# Altium PCB PCBGOST.PcbDoc (part 1 of 3)
Units mm, origin at the board's own origin, x right, y up, seen from the top; angles counter-clockwise.
Board outline 200 x 200 mm, 2 copper layers (Top Layer, Bottom Layer), stack 1.64 mm thick; 237 components, 177 nets, 928 pads, 315 vias.
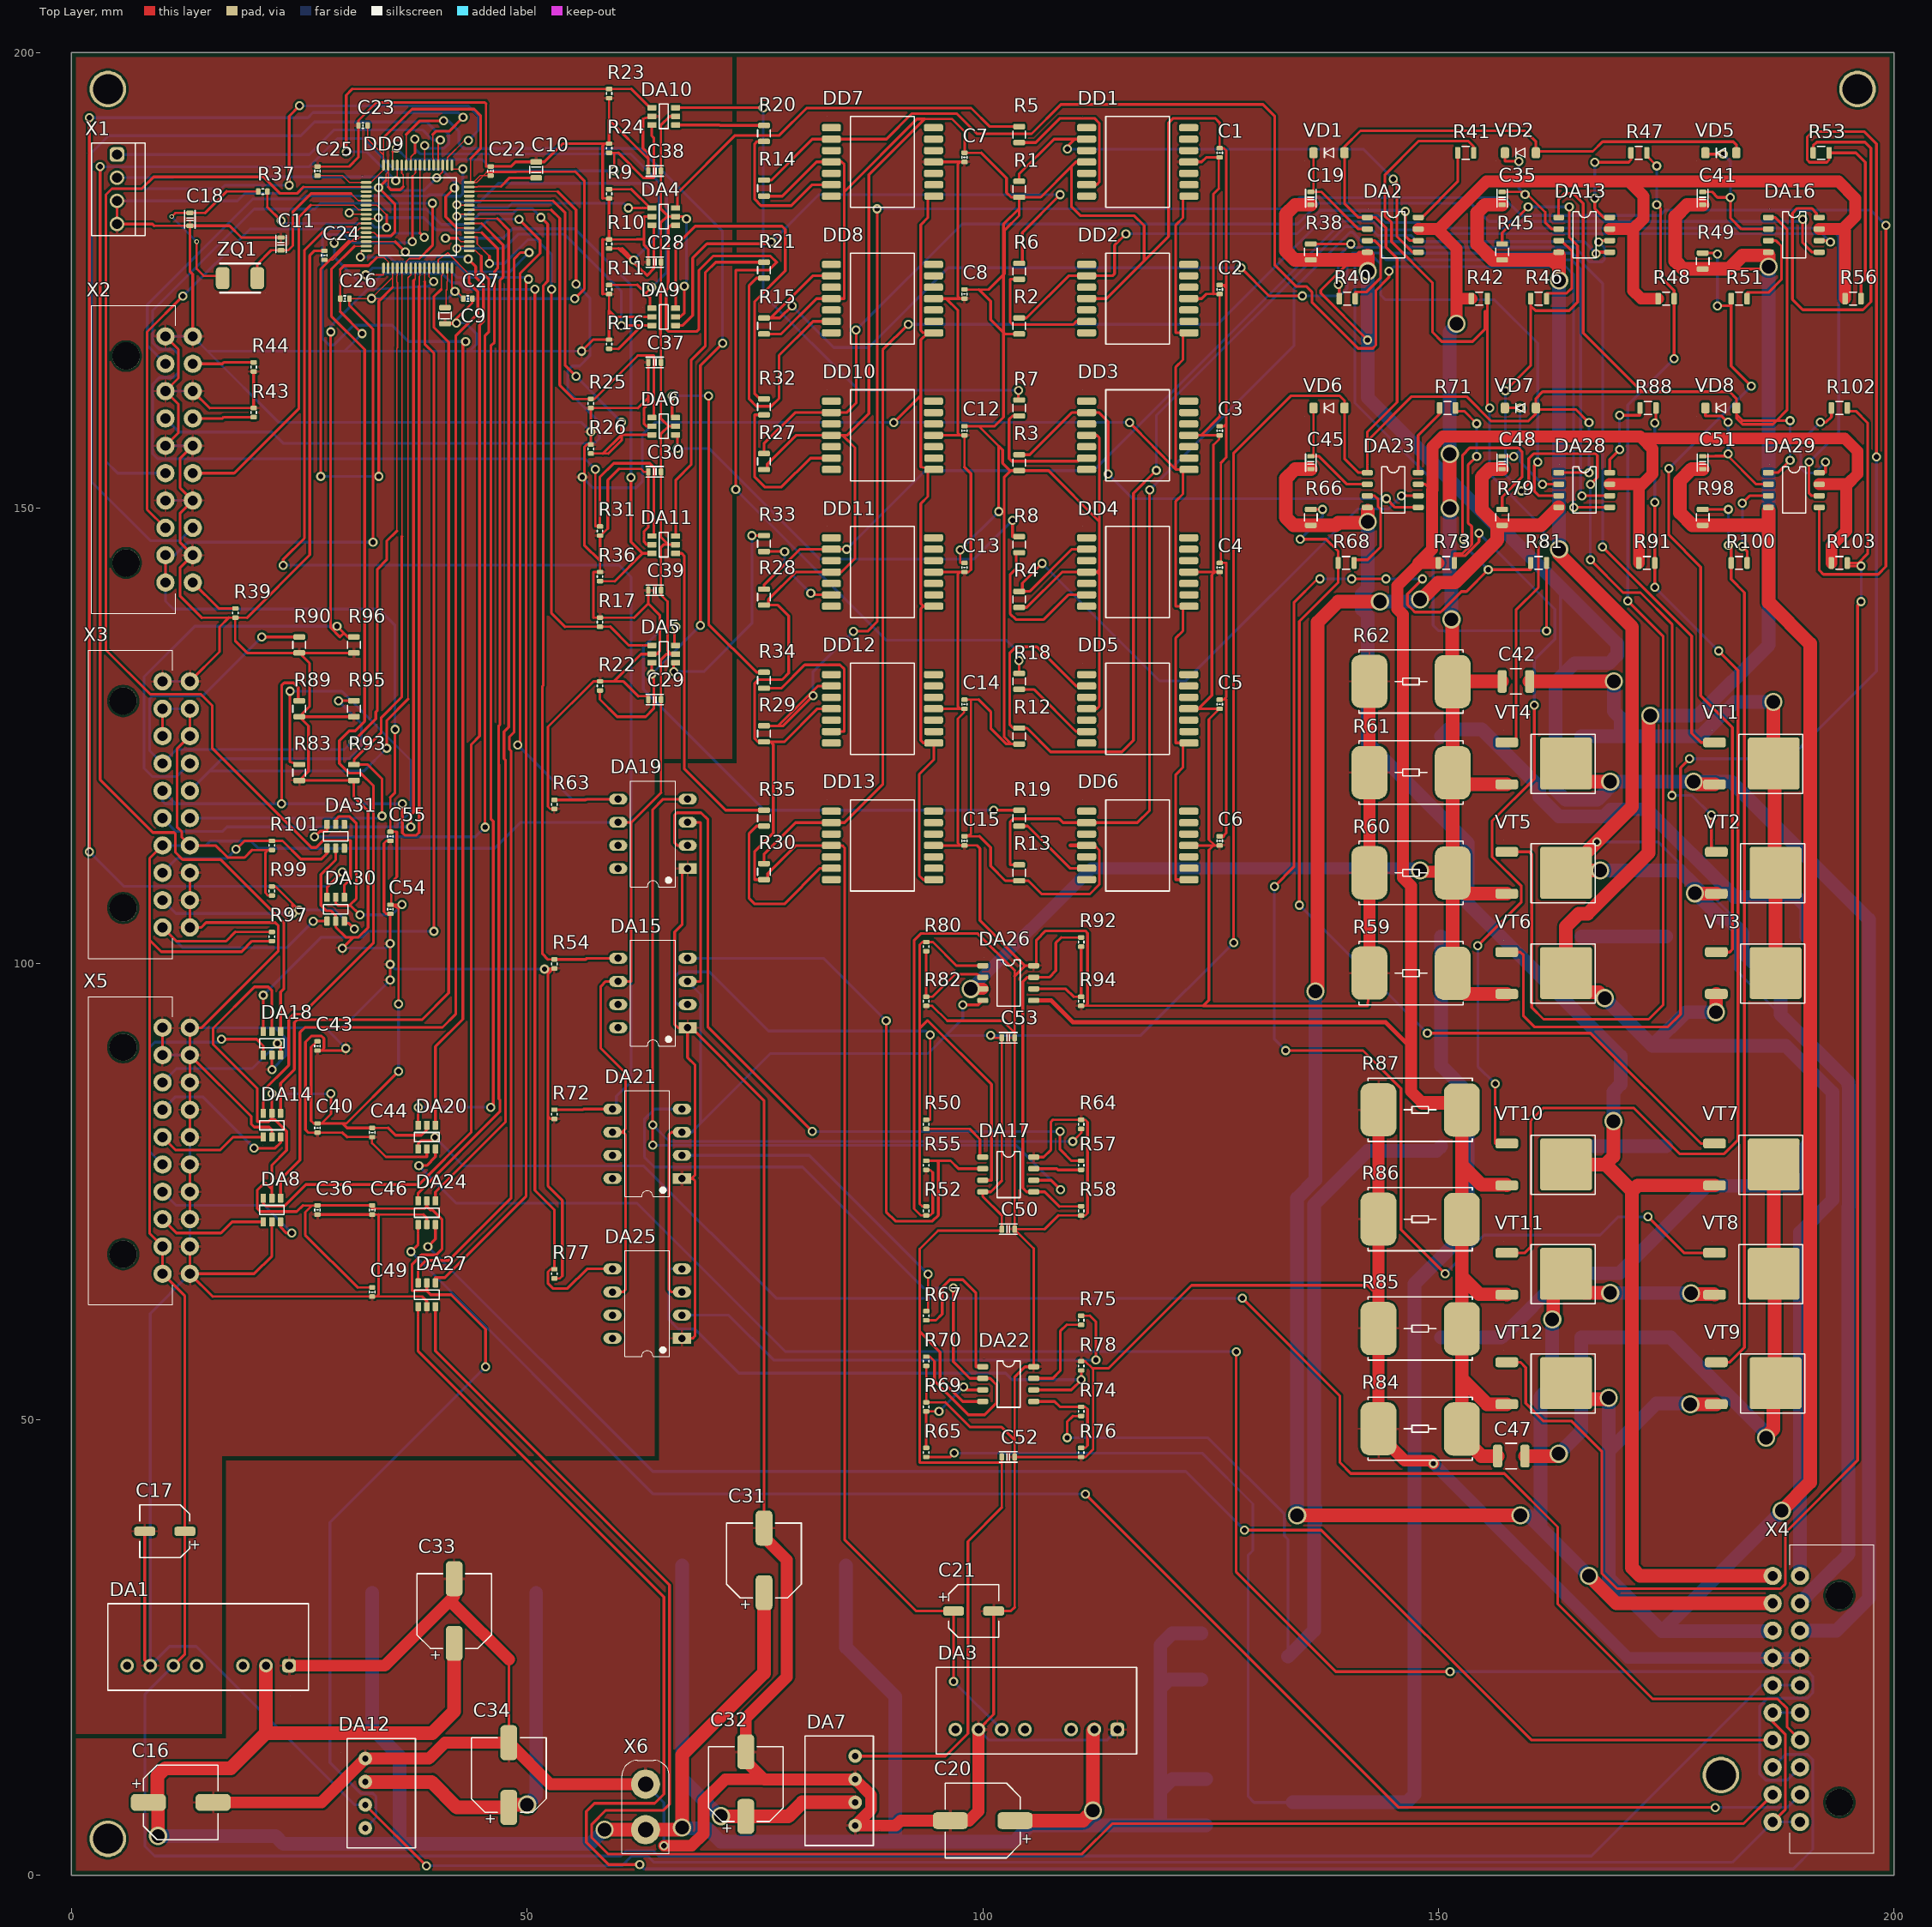
[diagram p0: Top Layer view]
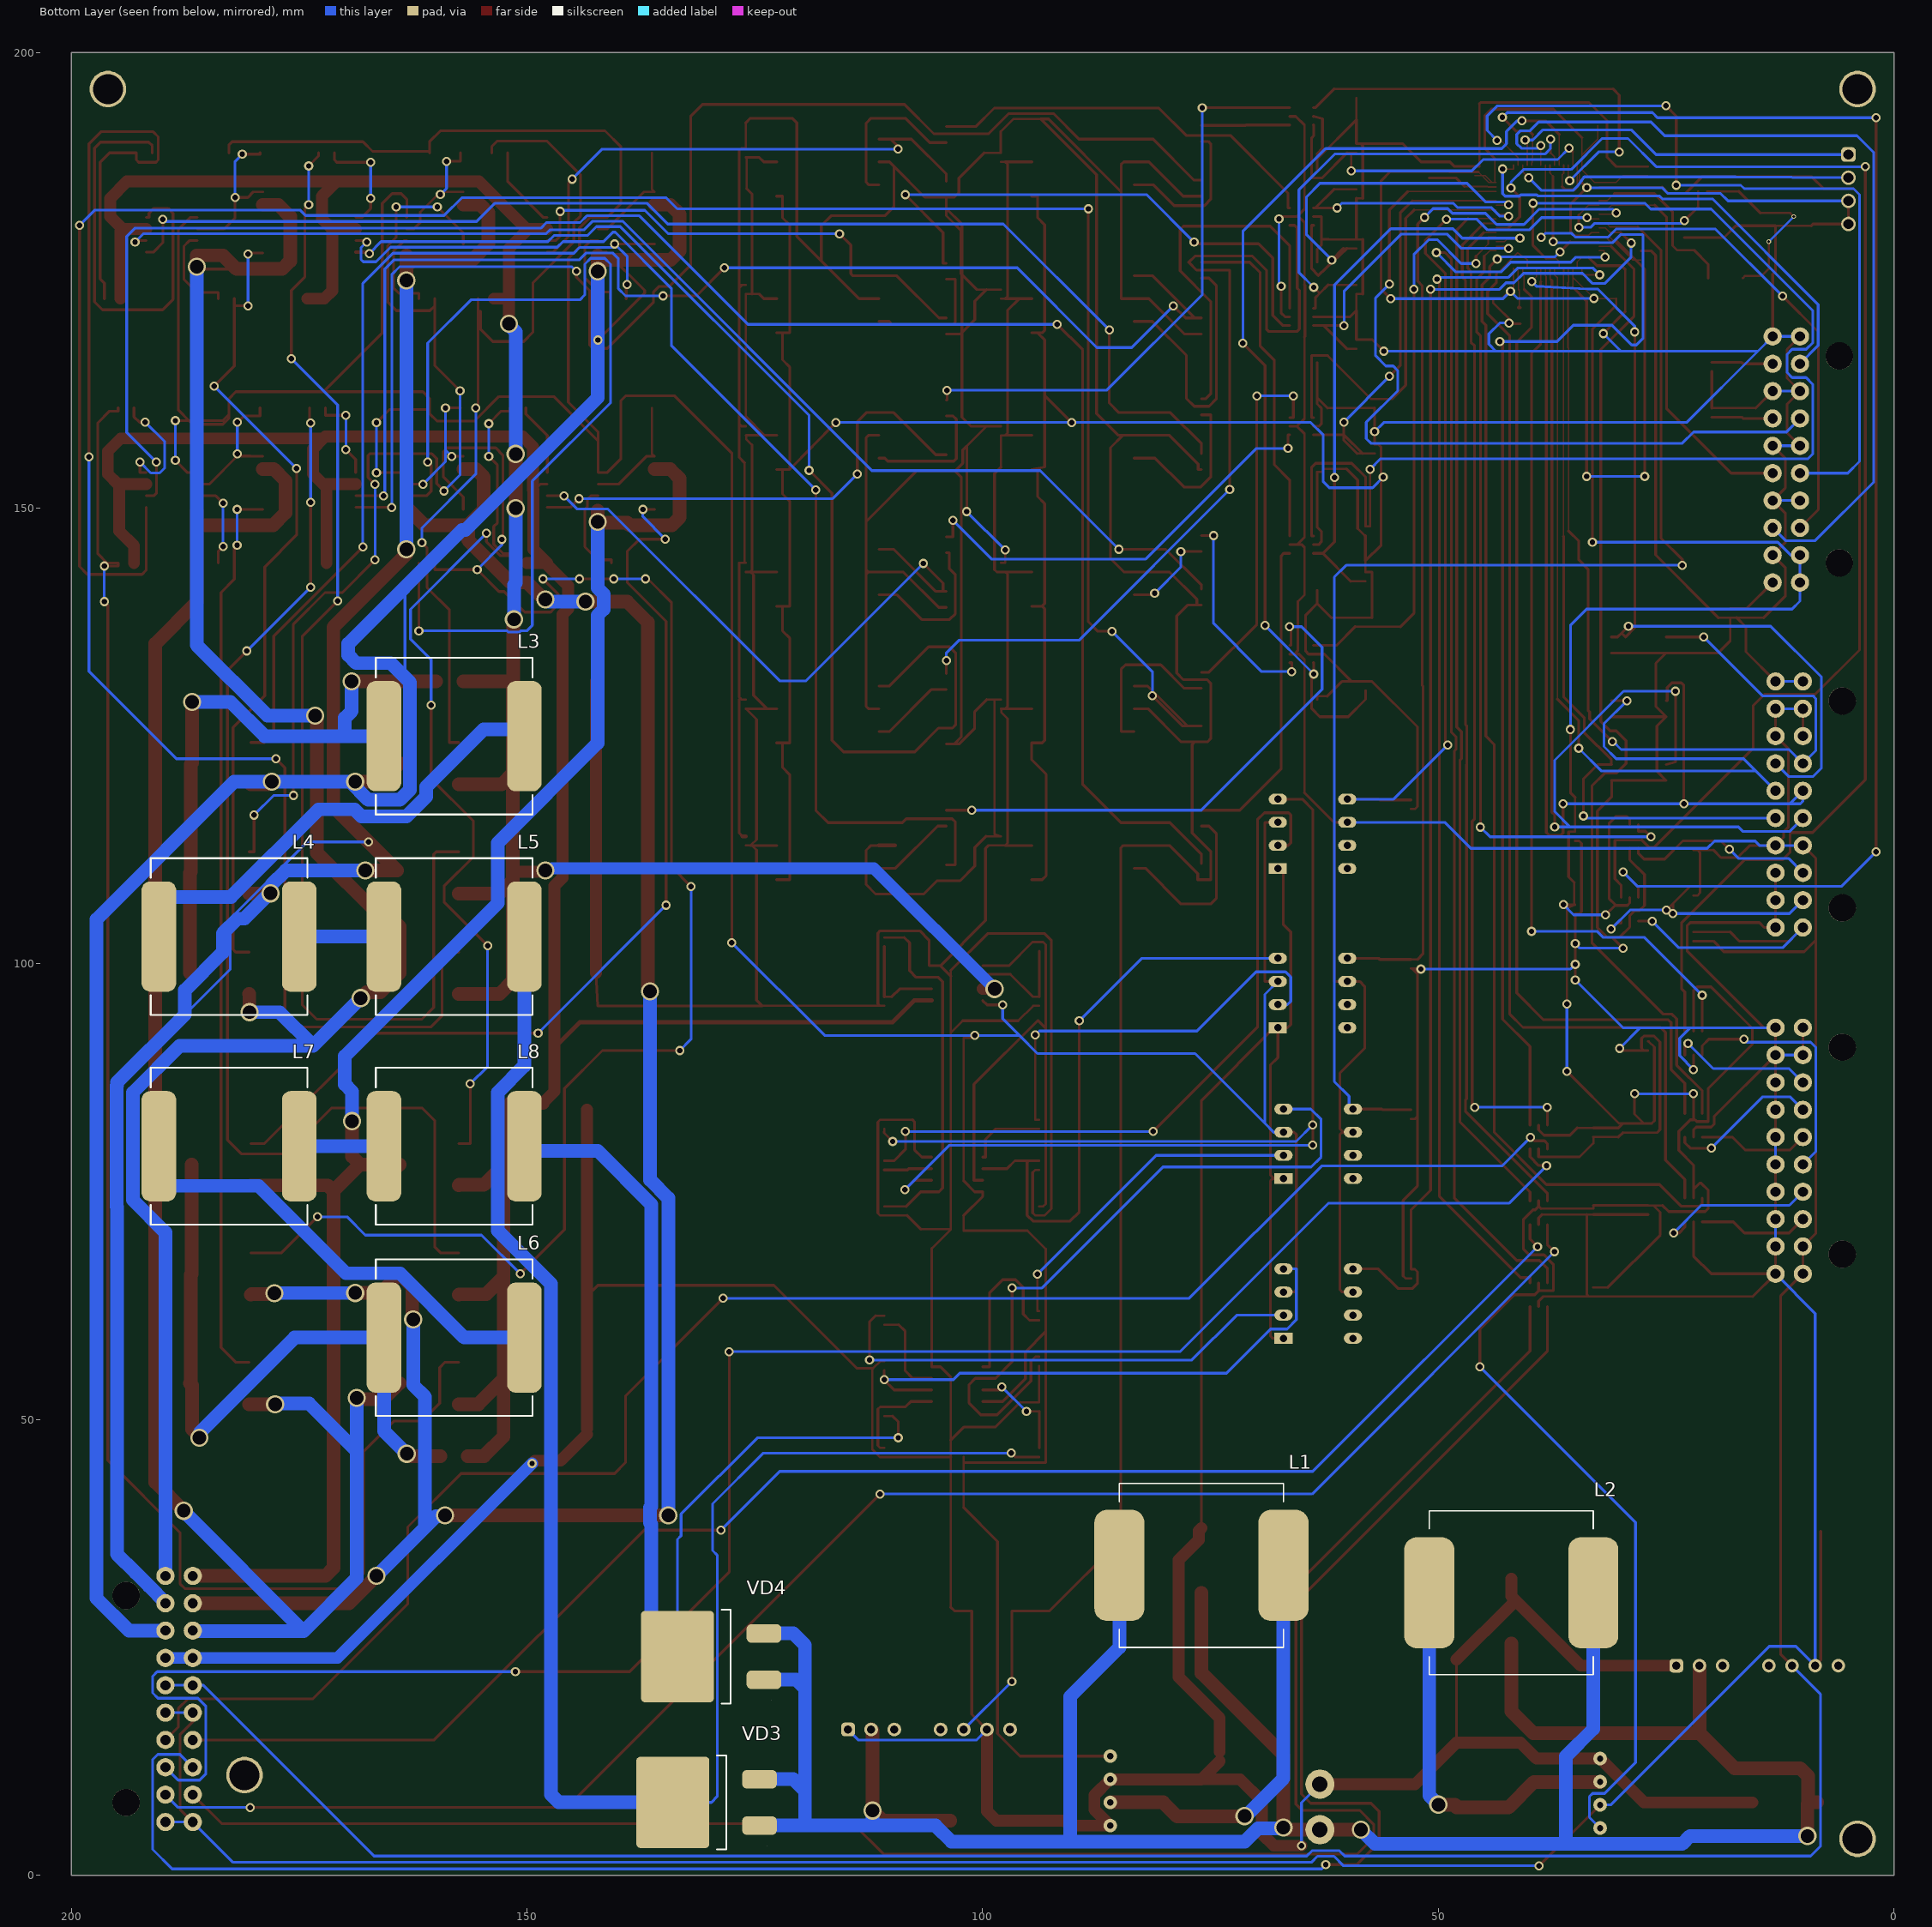
[diagram p1: Bottom Layer view, seen from below]

## Layer stack, top to bottom
Top Solder: solder mask 0.0102, Solder Resist, Dk 3.5
Top Layer: signal copper 0.07
Dielectric 1: dielectric 1.5, FR-4, Dk 4.8
Bottom Layer: signal copper 0.07
Bottom Solder: solder mask 0.0102, Solder Resist, Dk 3.5

## Board outline
0,0 0,200 200,200 200,0

## Design rules (kind name [scope] priority, off if disabled: settings)
Clearance [All] p1: gap=0.254 ignorepadtopadclearanceinfootprint=FALSE except(0: Arc-Hole Track-Hole SMDPad-Hole THPad-Hole Via-Hole Fill-Hole Poly-Hole Region-Hole Text-Hole; 0.2: Arc-SMDPad Track-SMDPad SMDPad-SMDPad; 0.3: Arc-Arc Arc-Track Track-Track)
PolygonConnect [All] p1: connectstyle=Relief reliefconductorwidth=0.254 reliefentries=4 polygonreliefangle="90 Angle" airgapwidth=0.254
RoutingVias [All] p1: holewidth=0.6 width=1 viastyle="Through Hole" minholewidth=0.3 minwidth=0.5 maxholewidth=1.5 maxwidth=2
SMDNeckDown [All] p1: percent=50.000
SolderMaskExpansion [All] p1: expansion=0.102 istentingtop=FALSE
Width [All] p1: maxlimit=1.5 minlimit=0.15 preferedwidth=0.3 minimp=50.000000 maximp=50.000000 favimp=50.000000
30 further rules are at their usual default settings.

## Components (designator, comment, footprint, x,y, rotation, side; value= is the part's Value field where it differs from the comment)
C1 "0,1uF" C0402C 126,189 r270 top value=0,1
C2 "0,1uF" C0402C 126,174 r270 top value=0,1
C3 "0,1uF" C0402C 126,158.5 r270 top value=0,1
C4 "0,1uF" C0402C 126,143.5 r270 top value=0,1
C5 "0,1uF" C0402C 126,128.5 r270 top value=0,1
C6 "0,1uF" C0402C 126,113.5 r270 top value=0,1
C7 "0,1uF" C0402C 98,188.5 r270 top value=0,1
C8 "0,1uF" C0402C 98,173.5 r270 top value=0,1
C9 "2.2uF" C0805C 41,171.125 r270 top value=2,2
C10 "2.2uF" C0805C 51,187.125 r90 top value=2,2
C11 "15pF" C0603C 23,179 r90 top value=15
C12 "0,1uF" C0402C 98,158.5 r270 top value=0,1
C13 "0,1uF" C0402C 98,143.5 r270 top value=0,1
C14 "0,1uF" C0402C 98,128.5 r270 top value=0,1
C15 "0,1uF" C0402C 98,113.5 r270 top value=0,1
C16 "100.0uF 50V" CAPAE-F 12,8 r0 top value=100,0
C17 "22.0uF 25V" CAPAE-C 10.25,37.75 r180 top value=22,0
C18 "15pF" C0603C 13,181.7 r270 top value=15
C19 "0,1uF" C0603C 136,184 r270 top value=0,1
C20 "100.0uF 50V" CAPAE-F 100,6 r180 top value=100,0
C21 "22.0uF 25V" CAPAE-C 99,29 r0 top value=22,0
C22 "0,1uF" C0402C 46,187 r90 top value=0,1
C23 "0,1uF" C0402C 32,192 r180 top value=0,1
C24 "0,1uF" C0402C 27.75,177.75 r90 top value=0,1
C25 "0,1uF" C0402C 27,187 r90 top value=0,1
C26 "0,1uF" C0402C 30,173 r180 top value=0,1
C27 "0,1uF" C0402C 43.5,173 r0 top value=0,1
C28 "0,1uF" C0603C 64,177 r0 top value=0,1
C29 "0,1uF" C0603C 64,129 r0 top value=0,1
C30 "0,1uF" C0603C 64,154 r0 top value=0,1
C31 "22.0uF 80V" CAPAE-F 76,34.55 r90 top value=22,0
C32 "22.0uF 80V" CAPAE-F 74,10 r90 top value=22,0
C33 "22.0uF 80V" CAPAE-F 42,29 r90 top value=22,0
C34 "22.0uF 80V" CAPAE-F 48,11 r90 top value=22,0
C35 "0,1uF" C0603C 157,184 r270 top value=0,1
C36 "0,1uF" C0402C 27,73 r270 top value=0,1
C37 "0,1uF" C0603C 64,166 r0 top value=0,1
C38 "0,1uF" C0603C 64,187 r0 top value=0,1
C39 "0,1uF" C0603C 64,141 r0 top value=0,1
C40 "0,1uF" C0402C 27,82 r270 top value=0,1
C41 "0,1uF" C0603C 179,184 r270 top value=0,1
C42 "2.2uF" C1210C 158.5,131 r0 top value=2,2
C43 "0,1uF" C0402C 27,91 r270 top value=0,1
C44 "0,1uF" C0402C 33,81.5 r270 top value=0,1
C45 "0,1uF" C0603C 136,155 r270 top value=0,1
C46 "0,1uF" C0402C 33,73 r270 top value=0,1
C47 "2.2uF" C1210C 158,46 r0 top value=2,2
C48 "0,1uF" C0603C 157,155 r270 top value=0,1
C49 "0,1uF" C0402C 33,64 r270 top value=0,1
C50 "0,1uF" C0603C 102.8,70.9 r180 top value=0,1
C51 "0,1uF" C0603C 179,155 r270 top value=0,1
C52 "0,1uF" C0603C 102.8,45.9 r180 top value=0,1
C53 "0,1uF" C0603C 102.8,91.9 r180 top value=0,1
C54 "0,1uF" C0402C 35,106 r270 top value=0,1
C55 "0,1uF" C0402C 35,114 r270 top value=0,1
DA1 "UWF1205S-3WR3" UWES-3WR3 15,23 r180 top
DA2 "IRS2011SPbf" SO-8 145,180 r0 top
DA3 "UWF1205S-3WR3" UWES-3WR3 105.89,16 r180 top
DA4 "SN74LVC2G17" SOT23-6 65,182 r0 top
DA5 "SN74LVC2G17" SOT23-6 65,134 r0 top
DA6 "SN74LVC2G17" SOT23-6 65,159 r0 top
DA7 "AM2S-2415SZ" AM2S-Z 84.25,9.27 r90 top
DA8 "SN74LVC2G17" SOT23-6 22,73 r90 top
DA9 "SN74LVC2G17" SOT23-6 65,171 r0 top
DA10 "SN74LVC2G17" SOT23-6 65,193 r0 top
DA11 "SN74LVC2G17" SOT23-6 65,146 r0 top
DA12 "AM2S-2403SZ" AM2S-Z 34,9 r270 top
DA13 "IRS2011SPbf" SO-8 166,180 r0 top
DA14 "SN74LVC2G17" SOT23-6 22,82.3 r90 top
DA15 "IL300" DIP8 67.62,93 r180 top
DA16 "IRS2011SPbf" SO-8 189,180 r0 top
DA17 "LM2904DR2G" SO-8 102.8,76.9 r0 top
DA18 "SN74LVC2G17" SOT23-6 22,91.3 r90 top
DA19 "IL300" DIP8 67.62,110.46 r180 top
DA20 "SN74LVC2G17" SOT23-6 39,81 r90 top
DA21 "IL300" DIP8 67,76.46 r180 top
DA22 "LM2904DR2G" SO-8 102.8,53.9 r0 top
DA23 "IRS2011SPbf" SO-8 145,152 r0 top
DA24 "SN74LVC2G17" SOT23-6 39,72.7 r90 top
DA25 "IL300" DIP8 67,58.92 r180 top
DA26 "LM2904DR2G" SO-8 102.8,97.9 r0 top
DA27 "SN74LVC2G17" SOT23-6 39,63.7 r90 top
DA28 "IRS2011SPbf" SO-8 166,152 r0 top
DA29 "IRS2011SPbf" SO-8 189,152 r0 top
DA30 "SN74LVC2G17" SOT23-6 29,106 r90 top
DA31 "SN74LVC2G17" SOT23-6 29,114 r90 top
DD1 "249ЛП5" 401.14-3 117,188 r270 top
DD2 "249ЛП5" 401.14-3 117,173 r270 top
DD3 "249ЛП5" 401.14-3 117,158 r270 top
DD4 "249ЛП5" 401.14-3 117,143 r270 top
DD5 "249ЛП5" 401.14-3 117,128 r270 top
DD6 "249ЛП5" 401.14-3 117,113 r270 top
DD7 "249ЛП5" 401.14-3 89,188 r270 top
DD8 "249ЛП5" 401.14-3 89,173 r270 top
DD9 "STM32F205RGT6" LQFP64 38,182 r0 top
DD10 "249ЛП5" 401.14-3 89,158 r270 top
DD11 "249ЛП5" 401.14-3 89,143 r270 top
DD12 "249ЛП5" 401.14-3 89,128 r270 top
DD13 "249ЛП5" 401.14-3 89,113 r270 top
L1 "IHLP6767GZER150M01" IHLP-6767GZ-01 76,34 r180 bottom value=15,0uH
L2 "IHLP6767GZER150M01" IHLP-6767GZ-01 42,31 r0 bottom value=15,0uH
L3 "IHLP6767GZER101" IHLP-6767GZ-11 158,125 r0 bottom value=100uH
L4 "IHLP6767GZER101" IHLP-6767GZ-11 182.7,103 r180 bottom value=100uH
L5 "IHLP6767GZER101" IHLP-6767GZ-11 158,103 r0 bottom value=100uH
L6 "IHLP6767GZER101" IHLP-6767GZ-11 158,59 r0 bottom value=100uH
L7 "IHLP6767GZER101" IHLP-6767GZ-11 182.7,80 r180 bottom value=100uH
L8 "IHLP6767GZER101" IHLP-6767GZ-11 158,80 r0 bottom value=100uH
R1 "340R" C0805R 104,185 r270 top
R2 "340R" C0805R 104,170 r270 top
R3 "340R" C0805R 104,155 r270 top
R4 "340R" C0805R 104,140 r270 top
R5 "169R" C0805R 104,191 r90 top
R6 "169R" C0805R 104,176 r90 top
R7 "169R" C0805R 104,161 r90 top
R8 "169R" C0805R 104,146 r90 top
R9 "20k" C0402R 59,184.5 r270 top
R10 "20k" C0402R 59,179 r90 top
R11 "20k" C0402R 59,174 r270 top
R12 "340R" C0805R 104,125 r270 top
R13 "340R" C0805R 104,110 r270 top
R14 "340R" C0805R 76,185.125 r270 top
R15 "340R" C0805R 76,170 r270 top
R16 "20k" C0402R 59,168 r90 top
R17 "20k" C0402R 58,137.5 r90 top
R18 "169R" C0805R 104,131 r90 top
R19 "169R" C0805R 104,116 r90 top
R20 "169R" C0805R 76,191.125 r90 top
R21 "169R" C0805R 76,176.125 r90 top
R22 "20k" C0402R 58,130.5 r90 top
R23 "20k" C0402R 59,195.5 r270 top
R24 "20k" C0402R 59,189.5 r90 top
R25 "20k" C0402R 57,161.5 r270 top
R26 "20k" C0402R 57,156.5 r90 top
R27 "340R" C0805R 76,155.125 r270 top
R28 "340R" C0805R 76,140.25 r270 top
R29 "340R" C0805R 76,125.25 r270 top
R30 "340R" C0805R 76,110.125 r270 top
R31 "20k" C0402R 58,147.5 r270 top
R32 "169R" C0805R 76,161.125 r90 top
R33 "169R" C0805R 76,146.125 r90 top
R34 "169R" C0805R 76,131.125 r90 top
R35 "169R" C0805R 76,116 r90 top
R36 "20k" C0402R 58,142.5 r90 top
R37 "680R" C0402R 21,184.75 r0 top
R38 "10k" C0805R 136,178.125 r90 top
R39 "10k" C0402R 18,138.5 r90 top
R40 "15R" C0805R 140,173 r0 top
R41 "15R" C0805R 153,189 r180 top
R42 "10k" C0805R 154.5,173 r180 top
R43 "10k" C0402R 20,160.5 r270 top
R44 "10k" C0402R 20,165.5 r90 top
R45 "10k" C0805R 157,178.125 r90 top
R46 "15R" C0805R 161,173 r0 top
R47 "15R" C0805R 172,189 r180 top
R48 "10k" C0805R 175,173 r180 top
R49 "10k" C0805R 179,177.125 r90 top
R50 "1.2k" C0402R 93.8,82.4 r270 top
R51 "15R" C0805R 183,173 r0 top
R52 "20k" C0402R 93.8,72.9 r270 top
R53 "15R" C0805R 192,189 r180 top
R54 "47k" C0402R 53,100 r270 top
R55 "20k" C0402R 93.8,77.9 r90 top
R56 "10k" C0805R 195.5,173 r180 top
R57 "1.2k" C0402R 110.8,77.9 r270 top
R58 "20k" C0402R 110.8,72.9 r270 top
R59 "0R20" WSR-3 147,99 r180 top
R60 "0R20" WSR-3 147,110 r180 top
R61 "0R20" WSR-3 147,121 r180 top
R62 "0R20" WSR-3 147,131 r180 top
R63 "47k" C0402R 53,117.5 r270 top
R64 "20k" C0402R 110.8,82.4 r270 top
R65 "620k" C0402R 93.8,46.4 r270 top
R66 "10k" C0805R 136,149 r90 top
R67 "1.2k" C0402R 93.8,61.4 r270 top
R68 "15R" C0805R 139.875,144 r0 top
R69 "20k" C0402R 93.8,51.4 r90 top
R70 "20k" C0402R 93.8,56.4 r90 top
R71 "15R" C0805R 151,161 r180 top
R72 "47k" C0402R 53,83.5 r270 top
R73 "10k" C0805R 150.875,144 r180 top
R74 "620k" C0402R 110.8,50.9 r270 top
R75 "1.2k" C0402R 110.8,60.9 r270 top
R76 "20k" C0402R 110.8,46.4 r270 top
R77 "47k" C0402R 53,66 r270 top
R78 "20k" C0402R 110.8,55.9 r270 top
R79 "10k" C0805R 157,149 r90 top
R80 "18k" C0402R 93.8,101.9 r270 top
R81 "15R" C0805R 161,144 r0 top
R82 "10k" C0402R 93.8,95.9 r90 top
R83 "95,3R" C0805R 25,121 r90 top
R84 "0R20" WSR-3 148,49 r180 top
R85 "0R20" WSR-3 148,60 r180 top
R86 "0R20" WSR-3 148,72 r180 top
R87 "0R20" WSR-3 148,84 r180 top
R88 "15R" C0805R 173,161 r180 top
R89 "95,3R" C0805R 25,128 r90 top
R90 "95,3R" C0805R 25,135 r90 top
R91 "10k" C0805R 172.875,144 r180 top
R92 "18k" C0402R 110.8,102.4 r270 top
R93 "95,3R" C0805R 31,121 r90 top
R94 "10k" C0402R 110.8,95.9 r90 top
R95 "95,3R" C0805R 31,128 r90 top
R96 "95,3R" C0805R 31,135 r90 top
R97 "1k" C0402R 22,103 r90 top
R98 "10k" C0805R 179,149 r90 top
R99 "1k" C0402R 22,108 r90 top
R100 "15R" C0805R 183,144 r0 top
R101 "1k" C0402R 22,113 r90 top
R102 "15R" C0805R 194,161 r180 top
R103 "10k" C0805R 194,144 r180 top
VD1 "DFLS160-7" SOD123 138,189 r180 top
VD2 "DFLS160-7" SOD123 159,189 r180 top
VD3 "VS-8TQ100S-M3" D2-PAK 130.5,8 r0 bottom
VD4 "VS-8TQ100S-M3" D2-PAK 130,24 r0 bottom
VD5 "DFLS160-7" SOD123 181,189 r180 top
VD6 "DFLS160-7" SOD123 138,161 r180 top
VD7 "DFLS160-7" SOD123 159,161 r180 top
VD8 "DFLS160-7" SOD123 181,161 r180 top
VT1 "IRFR7740PbF" D-PAK 185,122 r270 top
VT2 "IRFR7740PbF" D-PAK 185.2,110 r270 top
VT3 "IRFR7740PbF" D-PAK 185.2,99 r270 top
VT4 "IRFR7740PbF" D-PAK 162.2,122 r270 top
VT5 "IRFR7740PbF" D-PAK 162.2,110 r270 top
VT6 "IRFR7740PbF" D-PAK 162.2,99 r270 top
VT7 "IRFR7740PbF" D-PAK 185,78 r270 top
VT8 "IRFR7740PbF" D-PAK 185,66 r270 top
VT9 "IRFR7740PbF" D-PAK 185.2,54 r270 top
VT10 "IRFR7740PbF" D-PAK 162.2,78 r270 top
VT11 "IRFR7740PbF" D-PAK 162.2,66 r270 top
VT12 "IRFR7740PbF" D-PAK 162.2,54 r270 top
X1 "22-27-2041" 22-27-2041 5,185 r270 top
X2 "430452009" "MolexMicroFit 10x2" 10.32,141.85 r270 top
X3 "430452009" "MolexMicroFit 10x2" 10,104 r270 top
X4 "430452009" "MolexMicroFit 10x2" 189.68,32.85 r90 top
X5 "430452009" "MolexMicroFit 10x2" 10,66 r270 top
X6 "XT30U-F" "HEADER 2 XT30U" 63,5 r90 top
ZQ1 "8 МГц" ABM3 18.5,175.25 r180 top

## Footprints (in the part's own frame and the unit in brackets; to place one, negate y for a bottom-side part, rotate by r counter-clockwise, add the part's x,y. Pads: shape width x height; smd on the part's side, far side on the other; paste and mask are expansions set on the pad)
22-27-2041 [mm]
  rrect50% 1.6x1.6 hole 1.1: 1(-3.81,0)
  round 1.6 hole 1.1: 2(-1.27,0) 3(1.27,0) 4(3.81,0)
  silkscreen extent -5.08,-2.8 5.08,3.08, body extent -5.11,-2.83 5.05,2.97, height 11.72
401.14-3 [mm]
  rrect50% 0.8x2.1 smd: 1(-3.75,-5.6) 2(-2.5,-5.6) 3(-1.25,-5.6) 4(0,-5.6) 5(1.25,-5.6) 6(2.5,-5.6) 7(3.75,-5.6) 8(3.75,5.635) 9(2.5,5.635) 10(1.25,5.6) 11(0,5.6) 12(-1.25,5.6) 13(-2.5,5.6) 14(-3.75,5.6)
  silkscreen extent -5,-3.5 5,3.5, body extent -5,-6 5,6, height 2.72
ABM3 [mm] "5.0 X 3.2 X 1.30mm"
  rrect50% 1.5x2.4 smd: 1(-1.9,0) 2(1.9,0)
  silkscreen extent -2.2,-1.6 2.2,1.6, body extent -2.5,-1.6 2.5,1.6, height 0.25
AM2S-Z [mm]
  round 1.5 hole 0.7: 1(-3.81,-1.75) 2(-1.27,-1.75) 3(1.27,-1.75) 4(3.81,-1.75)
  silkscreen extent -6,-3.75 6,3.75, body extent -5.84,-3.75 5.84,3.75, height 9.65
C0402C [mm]
  rrect50% 0.5x0.7 smd: 1(-0.5,0) 2(0.5,0)
  silkscreen extent -0.1,-0.3 0.1,0.3, body extent -0.5,-0.28 0.5,0.28, height 0.5
C0402R [mm]
  rrect50% 0.5x0.7 smd: 1(-0.5,0) 2(0.5,0)
  silkscreen extent -0.1,-0.3 0.1,0.3, body extent -0.5,-0.28 0.5,0.28, height 0.5
C0603C [mm]
  rrect50% 0.5x0.8 smd: 1(-0.7,0) 2(0.7,0)
  silkscreen extent -0.98,-0.58 0.98,0.58, body extent -0.8,-0.4 0.8,0.4, height 0.5
C0805C [mm]
  rrect50% 0.6x1.3 smd: 1(-0.875,0) 2(0.875,0)
  silkscreen extent -0.4,-0.7 0.4,0.7, body extent -1,-0.6 1,0.6, height 0.8
C0805R [mm]
  rrect50% 0.6x1.3 smd: 1(-0.875,0) 2(0.875,0)
  silkscreen extent -0.4,-0.7 0.4,0.7, body extent -1,-0.6 1,0.6, height 0.5
C1210C [mm] "Chip Capacitor, 2-Leads, Body 3,2x2,5mm, IPC Medium Density"
  rrect50% 1x2.5 smd: 1(1.5,0) 2(-1.5,0)
  silkscreen extent -0.6,-1.4 0.6,1.4, body extent -2,-1.3 2,1.3, height 1.6
CAPAE-C [mm] "Aluminum Electrolytic Capacitor, Body 5,40x5,80x5,70mm, IPC Medium Density"
  rrect50% 2.3x1 smd: 1(-2.2,0) 2(2.2,0)
  silkscreen extent -2.75,-2.9 2.75,2.9, body extent -3.25,-2.9 3.25,2.9, height 5.7
CAPAE-F [mm] "Aluminum Electrolytic Capacitor, Body 8,30x8,30x10,20mm, IPC High Density"
  rrect50% 3.85x1.85 smd: 1(-3.55,0) 2(3.55,0)
  silkscreen extent -4.1,-4.1 4.1,4.1, body extent -5,-4.15 5,4.15, height 10.2
D2-PAK [mm] "D2-PAK, 3-Pads, Body 7,55x8,52mm (max), IPC Medium Density"
  rrect50% 3.81x2.03 smd: A(-6,-2.54) A(-6,2.54)
  rrect10% 8x10 smd: C(3.5,0)
  silkscreen extent -2.35,-5.15 -1.35,5.15, body extent -7.4,-5.15 7.85,5.15, height 4.82
D-PAK [mm]
  rrect10% 5.7x5.7 smd: D(0,1.8)
  rrect50% 1.1x2.5 smd: G(-2.3,-4.7) S(2.3,-4.7)
  silkscreen extent -3.2,-2.03 3.3,5, body extent -3.22,-4.92 3.27,4.58, height 2.3
DIP8 [mm]
  rect 2x1.2 hole 0.8: 1(0,0)
  oval 2x1.2 hole 0.8: 2(0,-2.54) 3(0,-5.08) 4(0,-7.62) 5(7.62,-7.62) 6(7.62,-5.08) 7(7.62,-2.54) 8(7.62,0)
  silkscreen extent 1.35,-9.62 6.27,2, body extent -0.13,-9.53 7.75,1.9, height 4.19
"HEADER 2 XT30U" [mm]
  round 3.2 hole 1.7: 1(0,0) 2(5,0)
  silkscreen extent -2.6,-2.6 7.6,2.6, body extent -2.6,-2.63 7.6,2.57, height 9.5
IHLP-6767GZ-01 [mm]
  rrect50% 5.5x12.2 smd: 1(-9,0) 2(9,0)
  silkscreen extent -9,-9 9,9, body extent -9,-9 9,9, height 7
IHLP-6767GZ-11 [mm] "Precision Wire Wound Inductor, 2-Leads, Body 17,15x17,15mm, IPC Medium Density"
  rrect50% 3.8x12.1 smd: 1(-7.7,0) 2(7.7,0)
  silkscreen extent -8.6,-8.6 8.6,8.6, body extent -8.57,-8.57 8.57,8.57, height 7
LQFP64 [mm]
  oval 1.2x0.3 smd: 1(-5.65,3.75) 2(-5.65,3.25) 3(-5.65,2.75) 4(-5.65,2.25) 5(-5.65,1.75) 6(-5.65,1.25) 7(-5.65,0.75) 8(-5.65,0.25) 9(-5.65,-0.25) 10(-5.65,-0.75) 11(-5.65,-1.25) 12(-5.65,-1.75) 13(-5.65,-2.25) 14(-5.65,-2.75) 15(-5.65,-3.25) 16(-5.65,-3.75) 33(5.65,-3.75) 34(5.65,-3.25) 35(5.65,-2.75) 36(5.65,-2.25) 37(5.65,-1.75) 38(5.65,-1.25) 39(5.65,-0.75) 40(5.65,-0.25) 41(5.65,0.25) 42(5.65,0.75) 43(5.65,1.25) 44(5.65,1.75) 45(5.65,2.25) 46(5.65,2.75) 47(5.65,3.25) 48(5.65,3.75)
  oval 0.3x1.2 smd: 17(-3.75,-5.65) 18(-3.25,-5.65) 19(-2.75,-5.65) 20(-2.25,-5.65) 21(-1.75,-5.65) 22(-1.25,-5.65) 23(-0.75,-5.65) 24(-0.25,-5.65) 25(0.25,-5.65) 26(0.75,-5.65) 27(1.25,-5.65) 28(1.75,-5.65) 29(2.25,-5.65) 30(2.75,-5.65) 31(3.25,-5.65) 32(3.75,-5.65) 49(3.75,5.65) 50(3.25,5.65) 51(2.75,5.65) 52(2.25,5.65) 53(1.75,5.65) 54(1.25,5.65) 55(0.75,5.65) 56(0.25,5.65) 57(-0.25,5.65) 58(-0.75,5.65) 59(-1.25,5.65) 60(-1.75,5.65) 61(-2.25,5.65) 62(-2.75,5.65) 63(-3.25,5.65) 64(-3.75,5.65)
  silkscreen extent -4.25,-4.25 4.25,4.25, body extent -6,-6 6,6, height 1.56
"MolexMicroFit 10x2" [mm]
  round 2 hole 1.1: 1(0,0) 2(-3,0) 3(-6,0) 4(-9,0) 5(-12,0) 6(-15,0) 7(-18,0) 8(-21,0) 9(-24,0) 10(-27,0) 11(0,3) 12(-3,3) 13(-6,3) 14(-9,3) 15(-12,3) 16(-15,3) 17(-18,3) 18(-21,3) 19(-24,3) 20(-27,3)
  round 3 hole 3: A(-24.85,-4.32) A(-2.15,-4.32)
  silkscreen extent -30.4,-8.1 3.4,1.1, body extent -30.6,-8.89 3.55,3.34, height 8.83
SO-8 [mm]
  rrect50% 1.2x0.6 smd: 1(-2.794,1.905) 2(-2.794,0.635) 3(-2.794,-0.635) 4(-2.794,-1.905) 5(2.794,-1.905) 6(2.794,-0.635) 7(2.794,0.635) 8(2.794,1.905)
  silkscreen extent -1.23,-2.54 1.31,2.54, body extent -3.07,-2.44 3.07,2.45, height 1.76
SOD123 [mm]
  rrect50% 0.91x1.22 smd: A(-1.7,0) C(1.7,0)
  silkscreen extent -0.5,-0.5 0.5,0.5, body extent -1.93,-0.9 1.93,0.9, height 1.22
SOT23-6 [mm]
  rrect25% 1x0.6 smd: 1(-1.3,0.95) 2(-1.3,0) 3(-1.3,-0.95) 4(1.3,-0.95) 5(1.3,0) 6(1.3,0.95)
  silkscreen extent -0.51,-1.35 0.51,1.35, body extent -1.4,-1.45 1.4,1.45, height 1.44
UWES-3WR3 [mm]
  rrect50% 1.5x1.5 hole 0.9: 1(-8.89,0)
  round 1.5 hole 0.9: 2(-6.35,0) 3(-3.81,0) 5(1.27,0) 6(3.81,0) 7(6.35,0) 8(8.89,0)
  silkscreen extent -11,-6.8 11,2.7, body extent -11,-6.8 11,2.7, height 12
WSR-3 [mm]
  rrect50% 3.94x5.84 smd: 1(-4.575,0.025) 2(4.575,0)
  silkscreen extent -5.73,-3.47 5.72,3.48, body extent -5.78,-3.47 5.78,3.51, height 2.43

## Part data
C1 C2 C3 C4 C5 C6 C7 C8 C12 C13 C14 C15 C22 C23 C24 C25 C26 C27 C36 C40 C43 C44 C46 C49 C54 C55: library part CC0402JRX7R7BB104, "CC0402JRX7R7BB104, 0402 X5R 0,1 uF 16V", Dielectric=X5R, Manufacturer=Yageo, Package="SMD 0402", Tolerance=±10%, Voltage=16V, Component Note="0402 0,1uF ±10% 16V X5R", ComponentLink1Description=Datasheet, gost BOM="0402 0,1uF ±10% 16V X5R", Part Number=CC0402JRX7R7BB104, Tmax=125, Tmin=-55, Units=uF
C9 C10: library part CL21B225KAFNNNE, "CL21B225KAFNNNE, 0805 X7R 2,2 uF 25V", Dielectric=X7R, Manufacturer=Samsung, Package="SMD 0805", Tolerance=±10%, Voltage=25V, Component Note="0805 2,2uF ±10% 25V X7R", ComponentLink1Description=Datasheet, ComponentLink1URL=https://media.digikey.com/pdf/Data%20Sheets/Samsung%20PDFs/CL_Series_MLCC_ds.pdf, gost BOM="0805 2,2uF ±10% 25V X7R", Part Number=CL21B225KAFNNNE, Tmax=125, Tmin=-55, Units=uF
C11 C18: library part CC0603JRNPO8BN150, "CC0603JRNPO8BN150, 0603 NP0 15 pF 25V", Dielectric=NP0, Manufacturer=Yageo, Package="SMD 0603", Tolerance=±5%, Voltage=25V, Component Note="0603 15pF ±5% 25V NP0", ComponentLink1Description=Datasheet, gost BOM="0603 15pF ±5% 25V NP0", Part Number=CC0603JRNPO8BN150, Tmax=125, Tmin=-55, Units=pF
C16 C20: library part EEEFK1H101P, "EEEFK1H101P, 50V 100,0uF ±20%", Manufacturer=Panasonic, Package=CAPAE-F, Tolerance=±20%, Voltage=50V, Component Note="CAPAE-F 100,0uF ±20% 50V", ComponentLink1Description=Datasheet, ComponentLink1URL=https://sds.compel.ru/item-pdf/31583381d324fa929794119b147f5f44/ps/pan~fk_smd.pdf, ESR=0,34, gost BOM="CAPAE-F 100,0uF ±20% 50V", Part Number=EEEFK1H101P, Tmax=105, Tmin=-55, Units=uF, Work=2000
C17 C21: library part EEEFK1E220R, "EEEFK1E220R, 25V 22,0uF ±20%", Manufacturer=Panasonic, Package=CAPAE-C, Tolerance=±20%, Voltage=25V, Component Note="CAPAE-C 22,0uF ±20% 25V", ComponentLink1Description=Datasheet, ComponentLink1URL=https://sds.compel.ru/item-pdf/31583381d324fa929794119b147f5f44/ps/pan~fk_smd.pdf, ESR=0,7, gost BOM="CAPAE-C 22,0uF ±20% 25V", Part Number=EEEFK1E220R, Tmax=105, Tmin=-55, Units=uF, Work=2000
C19 C28 C29 C30 C35 C37 C38 C39 C41 C45 C48 C50 C51 C52 C53: library part CL10B104KB8NNNC, "CL10B104KB8NNNC, 0603 X7R 0,1 uF 50V", Dielectric=X7R, Manufacturer=Samsung, Package="SMD 0603", Tolerance=±10%, Voltage=50V, Component Note="0603 0,1uF ±10% 50V X7R", ComponentLink1Description=Datasheet, ComponentLink1URL=https://media.digikey.com/pdf/Data%20Sheets/Samsung%20PDFs/CL_Series_MLCC_ds.pdf, gost BOM="0603 0,1uF ±10% 50V X7R", Part Number=CL10B104KB8NNNC, Tmax=125, Tmin=-55, Units=uF
C31 C32 C33 C34: library part EEEFK1K220P, "EEEFK1K220P, 80V 22,0uF ±20%", Manufacturer=Panasonic, Package=CAPAE-F, Tolerance=±20%, Voltage=80V, Component Note="CAPAE-F 22,0uF ±20% 80V", ComponentLink1Description=Datasheet, ComponentLink1URL=https://sds.compel.ru/item-pdf/31583381d324fa929794119b147f5f44/ps/pan~fk_smd.pdf, ESR=1,3, gost BOM="CAPAE-F 22,0uF ±20% 80V", Part Number=EEEFK1K220P, Tmax=105, Tmin=-55, Units=uF, Work=2000
C42 C47: library part CL32B225KCJSNNE, "CL32B225KCJSNNE, 1210 X7R  2,2 uF 100V", Dielectric=X7R, Manufacturer=Samsung, Package="SMD 1210", Tolerance=±10%, Voltage=100V, Component Note="1210 2,2uF ±10% 100V X7R", ComponentLink1Description=Datasheet, ComponentLink1URL=http://datasheet.octopart.com/CL32B225KCJSNNE-Samsung-datasheet-12549342.pdf, gost BOM="1210 2,2uF ±10% 100V X7R", Part Number=CL32B225KCJSNNE, Tmax=125, Tmin=-55, Units=uF
DA1 DA3: "DC/DC 4,5-36V, 5V, 3W", Current=300mA, Manufacturer=MORNSUN, Package=SIP7, Power=3W, Cap=220, Component Note="SIP7, 4,5/5", ComponentLink1Description=Datasheet, gost BOM="UWF1205S-3WR3 MORNSUN", K=77, Part Number=UWF1205S-3WR3, Tmax=105, Tmin=-40, Type=DC/DC, Vimax=36, Vimin=4,5, VO=5
DA2 DA13 DA16 DA23 DA28 DA29: "Микросхема IRS2011SPBF, SOIC-8", Manufacturer="International Rectifier", Package=SO-8, Component Note=SO-8, ComponentLink1Description=Datasheet, gost BOM=#NAME?, Part Number=IRS2011SPbf, Type=FETDRIVER
DA4 DA5 DA6 DA8 DA9 DA10 DA11 DA14 DA18 DA20 DA24 DA27 DA30 DA31: library part SN74LVC2G17DBVR, "Dual Schmitt-Trigger Buffer", Manufacturer="Texas Instruments", Package=SOT23-6, Component Note=SOT23-6, ComponentLink1Description=Datasheet, ComponentLink1URL=https://www.ti.com/lit/ds/sces381n/sces381n.pdf, gost BOM=#NAME?, Part Number=SN74LVC2G17DBVR, Tmax=125, Tmin=-40, Type=Buffer
DA7: "DC/DC 21,6-26,4V, 15V, 2W", Current=130, Manufacturer=Aimtec, Power=2W, Component Note=", 21,6/15", ComponentLink1Description=Datasheet, ComponentLink1URL=http://www.aimtec.com/site/Aimtec/files/Datasheet/HighResolution/AM2S-Z.pdf, gost BOM="AM2S-2415SZ Aimtec", K=84, Part Number=AM2S-2415SZ, Tmax=85, Tmin=-40, Type=DC/DC, Vimax=26,4, Vimin=21,6, VO=15
DA12: "DC/DC 21,6-26,4V, 3,3V, 2W", Current=400, Manufacturer=Aimtec, Power=2W, Component Note=", 21,6/3,3", ComponentLink1Description=Datasheet, ComponentLink1URL=http://www.aimtec.com/site/Aimtec/files/Datasheet/HighResolution/AM2S-Z.pdf, gost BOM="AM2S-2403SZ Aimtec", K=74, Part Number=AM2S-2403SZ, Tmax=85, Tmin=-40, Type=DC/DC, Vimax=26,4, Vimin=21,6, VO=3,3
DA17 DA22 DA26: "Low power dual operational amplifier", FREQ=1MHz, Manufacturer="On Semiconductor", Package=SO-8, Chanels=2, Component Note=SO-8, ComponentLink1Description=Datasheet, ComponentLink1URL=https://www.onsemi.com/pdf/datasheet/lm358-d.pdf, gost BOM="LM2904DR2G On Semiconductor", Part Number=LM2904DR2G, Tmax=105, Tmin=-40, Type=OPAMP
DD1 DD2 DD3 DD4 DD5 DD6 DD7 DD8 DD10 DD11 DD12 DD13: "Оптоэлектронный переключатель-инвертор", Manufacturer="ОАО\"Протон\"", Package=401.14-3, Component Note=401.14-3, ComponentLink1Description=Datasheet, ComponentLink1URL=https://www.proton-orel.ru/files/products/optopary/germetic/logicheskie/6-04-2017/249lp5.pdf, Part Number=249ЛП5, TU="бКО. 347.412 ТУ"
DD9: "STM32F205RGT6, ARM Cortex-M3,1024 KB Flash, 128 KB RAM, LQFP64", FREQ=120, Manufacturer=STMicroelectronics, Package=LQFP64, CAN=2, Component Note=LQFP64, ComponentLink1Description=Datasheet, ComponentLink1URL=http://www.st.com/st-web-ui/static/active/en/resource/technical/document/reference_manual/CD00171190.pdf, Core="ARM Cortex-M3", CPU Speed="150 DMIPS", EEPROM=-, ETH=-, FLASH="1024 KB", gost BOM="STM32F205RGT6 STMicroelectronics", Part Number=STM32F205RGT6, RAM="128 KB", Tmax=125, Tmin=-40
L1 L2: "17.2x17.2x7 mm, 15,0uH 12,5", Current=12,5, Manufacturer=Vishay, Package="17.2x17.2x7 mm", Component Note="17.2x17.2x7 mm, 15,0uH 12,5", ComponentLink1Description=Datasheet, gost BOM="17.2x17.2x7 mm, 15,0uH 12,5", Part Number=IHLP6767GZER150M01
L3 L4 L5 L6 L7 L8: "17.2x17.2x7 mm, 100uH 5", Current=5, CurrentSatur=4, Manufacturer=Vishay, Package="17.2x17.2x7 mm", Component Note="17.2x17.2x7 mm, 100uH 5", ComponentLink1Description=Datasheet, DCR=110, gost BOM="17.2x17.2x7 mm, 100uH 5", Part Number=IHLP6767GZER101
R1 R2 R3 R4 R12 R13 R14 R15 R27 R28 R29 R30: library part "Р1-12-0,125-340 Ом ±1%", "Р1-12-0,125-340 Ом ±1%, 0,125 SMD 0805", Package="SMD 0805", Power=0,125, Tolerance=1%, Component Note="0805 340R 1%", Part Number="Р1-12-0,125-340 Ом ±1%", TU="АЛЯР.434110.005 ТУ", Type=Р1-12
R5 R6 R7 R8 R18 R19 R20 R21 R32 R33 R34 R35: library part "Р1-12-0,125-169 Ом ±1%", "Р1-12-0,125-169 Ом ±1%, 0,125 SMD 0805", Package="SMD 0805", Power=0,125, Tolerance=1%, Component Note="0805 169R 1%", Part Number="Р1-12-0,125-169 Ом ±1%", TU="АЛЯР.434110.005 ТУ", Type=Р1-12
R9 R10 R11 R16 R17 R22 R23 R24 R25 R26 R31 R36 R52 R55 R58 R64 R69 R70 R76 R78: library part "Р1-12-0,062-20 кОм ±5%", "Р1-12-0,062-20 кОм ±5%, 0,062 SMD 0402", Package="SMD 0402", Power=0,062, Tolerance=5%, Component Note="0402 20k 0,05", Part Number="Р1-12-0,062-20 кОм ±5%", TU="АЛЯР.434110.005 ТУ", Type=Р1-12
R37: library part "Р1-12-0,062-680 Ом ±1%", "Р1-12-0,062-680 Ом ±1%, 0,062 SMD 0402", Package="SMD 0402", Power=0,062, Tolerance=1%, Component Note="0402 680R 1%", Part Number="Р1-12-0,062-680 Ом ±1%", TU="АЛЯР.434110.005 ТУ", Type=Р1-12
R38 R42 R45 R48 R49 R56 R66 R73 R79 R91 R98 R103: library part "Р1-12-0,125-10 кОм ±5%", "Р1-12-0,125-10 кОм ±5%, 0,125 SMD 0805", Package="SMD 0805", Power=0,125, Tolerance=5%, Component Note="0805 10k 0,05", Part Number="Р1-12-0,125-10 кОм ±5%", TU="АЛЯР.434110.005 ТУ", Type=Р1-12
R39 R43 R44: library part "Р1-12-0,062-10 кОм ±5%", "Р1-12-0,062-10 кОм ±5%, 0,062 SMD 0402", Package="SMD 0402", Power=0,062, Tolerance=5%, Component Note="0402 10k 0,05", Part Number="Р1-12-0,062-10 кОм ±5%", TU="АЛЯР.434110.005 ТУ", Type=Р1-12
R40 R41 R46 R47 R51 R53 R68 R71 R81 R88 R100 R102: library part "Р1-12-0,125-15 Ом ±1%", "Р1-12-0,125-15 Ом ±1%, 0,125 SMD 0805", Package="SMD 0805", Power=0,125, Tolerance=1%, Component Note="0805 15R 1%", Part Number="Р1-12-0,125-15 Ом ±1%", TU="АЛЯР.434110.005 ТУ", Type=Р1-12
R50 R57 R67 R75: library part "Р1-12-0,062-1.2 кОм ±1%", "Р1-12-0,062-1.27 кОм ±1%, 0,062 SMD 0402", Package="SMD 0402", Power=0,062, Tolerance=1%, Component Note="0402 1.2k 1%", Part Number="Р1-12-0,062-1.2 кОм ±1%", TU="АЛЯР.434110.005 ТУ", Type=Р1-12
R54 R63 R72 R77: library part "Р1-12-0,062-47 кОм ±1%", "Р1-12-0,062-47 кОм ±1%, 0,062 SMD 0402", Package="SMD 0402", Power=0,062, Tolerance=1%, Component Note="0402 47k 1%", Part Number="Р1-12-0,062-47 кОм ±1%", TU="АЛЯР.434110.005 ТУ", Type=Р1-12
R59 R60 R61 R62 R84 R85 R86 R87: library part WSR3R2000FEA, "WSR3R2000FEA, WSR-3 1% 0R20", Manufacturer="Vishay Dale", Package=WSR-3, Tolerance=1%, Component Note="SR-3 0R20 1%", ComponentLink1Description=Datasheet, ComponentLink1URL=http://www.vishay.com/docs/30101/wsr.pdf, Part Number=WSR3R2000FEA
R65 R74: library part "Р1-12-0,062-620 кОм ±5%", "Р1-12-0,062-620 кОм ±5%, 0,062 SMD 0402", Package="SMD 0402", Power=0,062, Tolerance=5%, Component Note="0402 620k 0,05", Part Number="Р1-12-0,062-620 кОм ±5%", TU="АЛЯР.434110.005 ТУ", Type=Р1-12
R80 R92: library part "Р1-12-0,062-18 кОм ±1%", "Р1-12-0,062-18 кОм ±1%, 0,062 SMD 0402", Package="SMD 0402", Power=0,062, Tolerance=1%, Component Note="0402 18k 1%", Part Number="Р1-12-0,062-18 кОм ±1%", TU="АЛЯР.434110.005 ТУ", Type=Р1-12
R82 R94: library part "Р1-12-0,062-10 кОм ±1%", "Р1-12-0,062-10 кОм ±1%, 0,062 SMD 0402", Package="SMD 0402", Power=0,062, Tolerance=1%, Component Note="0402 10k 1%", Part Number="Р1-12-0,062-10 кОм ±1%", TU="АЛЯР.434110.005 ТУ", Type=Р1-12
R83 R89 R90 R93 R95 R96: library part "Р1-12-0,125-95,3 Ом ±1%", "Р1-12-0,125-95,3 Ом ±1%, 0,125 SMD 0805", Package="SMD 0805", Power=0,125, Tolerance=1%, Component Note="0805 95,3R 1%", Part Number="Р1-12-0,125-95,3 Ом ±1%", TU="АЛЯР.434110.005 ТУ", Type=Р1-12
R97 R99 R101: library part "Р1-12-0,062-1 кОм ±5%", "Р1-12-0,062-1 кОм ±5%, 0,062 SMD 0402", Package="SMD 0402", Power=0,062, Tolerance=5%, Component Note="0402 1k 0,05", Part Number="Р1-12-0,062-1 кОм ±5%", TU="АЛЯР.434110.005 ТУ", Type=Р1-12
VD1 VD2 VD5 VD6 VD7 VD8: "DFLS160-7, SOD123 60V 1A, 0,5V", Current=1, Manufacturer="Diodes Incorporated", Package=SOD123, Voltage=60, Component Note=SOD123, ComponentLink1Description=Datasheet, gost BOM="DFLS160-7 Diodes Incorporated", Part Number=DFLS160-7, Vf=0,5
VT1 VT2 VT3 VT4 VT5 VT6 VT7 VT8 VT9 VT10 VT11 VT12: "IRFR7740PbF, D-PAK 87A 75V", Manufacturer=Infineon, Package=D-PAK, Component Note="D-PAK, N, 75V, 87A", ComponentLink1Description=Datasheet, gost BOM="IRFR7740PbF Infineon", I Drain=87, Input Cap=4430, Part Number=IRFR7740PbF, RDS=0,0072, Type=N, U Drain-Source=75, U Gate max=20, U Gate th=2,1
ZQ1: library part ABM3-8.000MHZ-D2Y-T, "ABM3-8.000MHZ-D2Y-T, ABM3 8 МГц 18pF", Load Capacitance=18pF, Manufacturer="Abracon LLC", Package=ABM3, Component Note="ABM3 8 МГц", ComponentLink1Description=Datasheet, ComponentLink1URL=https://abracon.com/Resonators/abm3.pdf, gost BOM="ABM3 8 МГц", Part Number=ABM3-8.000MHZ-D2Y-T
DA15 DA19 DA21 DA25: ComponentLink1Description=Chipdip, ComponentLink1URL=https://www.chipdip.ru/product0/8003193245

## Free pads (board coordinates)
  round 4 hole 3.3 unplated: 2(4,4) 2(4,196) 2(181,11) 2(196,196)

## Via types
v1: diameter 1, hole 0.6, Top Layer to Bottom Layer, 272 vias
v2: diameter 2, hole 1.5, Top Layer to Bottom Layer, 41 vias
v3: diameter 0.5, hole 0.3, Top Layer to Bottom Layer, 2 vias

## Nets (pads, with @x,y where several pads share a name; then routed paths per layer and width w, separated by ;. In a path a pad name is that pad's centre, name@x,y a point inside that pad or via, vN(x,y) a via of type N, cw(c..) or ccw(c..) an arc to the next point about the centre after c; other vN are vias at no path point)
+3V3D: C22.1 C23.1 C24.1 C25.1 C26.1 C27.1 C36.1 C40.1 C43.1 C44.1 C46.1 C49.1 C54.1 C55.1 DA8.5 DA12.4 DA14.5 DA18.5 DA20.5 DA24.5 DA27.5 DA30.5 DA31.5 DD9.1 DD9.13 DD9.19 DD9.32 DD9.48 DD9.64 X2.1 X2.2 | length 534.7
  Top Layer w0.15: C25.1@27,186.5 29.75,186.5 30.5,185.75 DD9.1@32.35,185.75 32.868,185.75 34.25,187.132 DD9.64@34.25,187.65 34.25,188.75 ; C24.1@27.75,177.25 28.69,177.25 31.19,179.75 DD9.13@32.35,179.75 31.643,179.75 31.191,179.299 30.429,179.299 ; C26.1@30.5,173 34,173 35.25,174.25 ; C23.1@32.5,192 32.5,190.5 34.25,188.75 ; v1(32.918,173.025) 35.25,175.356 ; 34.25,190.663 34.25,188.75 ; 35.25,174.244 35.25,174.25 ; DD9.32@41.75,176.35 41.75,174.35 ; v1(42.088,173.812) 41.75,174.15 41.75,174.35 ; C27.1@43,173 43,173.1 41.75,174.35 ; 43.79,188.36 DD9.48@43.79,185.75 ; 45.619,186.893 44.475,185.75 DD9.48@44.1,185.75 ; C22.1@46,186.5 44.85,186.5 DD9.48@44.1,185.75 ; 35.25,174.25 DD9.19@35.25,176.35 35.25,175.356 ; 35.25,174.25 35.25,175.356 ; DD9.48@43.79,185.75 DD9.48@43.65,185.75 DD9.48@44.1,185.75 ; DD9.48@43.79,185.75 DD9.48@44.1,185.75
  Top Layer w0.25: 25.4,73.5 26.416,73.5 ; 25.654,72.738 26.416,73.5 ; 26.289,82.804 26.593,82.5 C40.1@27,82.5 27.432,82.5 ; 26.289,90.871 26.918,91.5 C43.1@27,91.5 ; C36.1@27,73.5 26.416,73.5 ; 28.473,83.541 27.432,82.5 ; 30.176,82.5 29.743,82.5 27.432,82.5 ; 30.5,172.27 C26.1@30.5,173 ; 31.41,64.5 C49.1@33,64.5 ; C46.1@33,73.5 32.995,73.5 32.995,73.152 38.746,73.152 ; C44.1@33,82 34.764,82 ; 35,118.277 C55.1@35,114.5 35.712,114.5 ; 35.103,108.941 C54.1@35.103,106.5 ; v1(35.89,95.606) 35.89,106.112 C54.1@35,106.5 C54.1@35.103,106.5 ; v1(36.278,106.5) C54.1@35.103,106.5
  Top Layer w0.3: X2.1@10.32,141.85 X2.2@10.32,144.85 ; DA8.5@22,74.3 22,75.282 ; DA18.5@22,92.6 22,97.075 21.59,97.485 20.091,97.485 15.545,92.939 15.545,91.186 20.396,86.335 20.396,82.702 21.644,82.702 22,83.058 ; v1(22.022,85.75) 22,85.729 DA14.5@22,83.6 22,83.058 ; 25.4,73.5 24.722,72.822 20.726,72.822 20.396,73.152 20.396,75.184 21.158,75.946 21.336,75.946 22,75.282 ; 25.654,72.738 25.654,70.256 31.41,64.5 ; 26.289,82.804 26.289,90.871 ; C36.1@27,73.5 C46.1@32.995,73.5 ; v1(27.356,153.492) 27.356,176.225 30.429,179.299 ; 28.473,83.541 v1(28.473,85.75) ; DA30.5@29,107.3 29,106.68 29.254,106.426 30.505,106.426 30.556,106.477 ; DA31.5@29,115.3 29,115.824 29.371,116.195 30.48,116.195 31.267,115.408 31.267,107.188 30.556,106.477 ; 29.743,82.5 30.243,82 C44.1@33,82 ; 30.176,82.5 v1(35.89,88.214) ; 30.5,172.27 33.096,169.674 v1(33.096,146.279) ; v1(31.648,105.385) 30.556,106.477 ; v1(33.731,153.492) 33.731,172.725 35.25,174.244 ; 34.25,190.663 37.378,193.792 44.196,193.792 44.897,193.091 44.897,189.467 43.79,188.36 ; 34.764,82 35.56,81.204 38.416,81.204 39,81.788 DA20.5@39,82.3 ; 35,118.277 35.509,118.786 v1(35.509,125.73) ; 35.103,108.941 35.712,109.55 35.712,114.5 ; 38.746,73.152 39,73.406 ; DA27.5@39,65 39,64.135 ; DA24.5@39,74 39,73.406 ; v1(45.441,55.804) 45.441,59.919 41.656,63.703 39.432,63.703 39,64.135 ; 45.619,186.893 48.793,186.893 55.27,186.944 56.286,185.928 56.286,174.041 v1(55.245,172.999) ; 22,75.282 22,77.931 23.622,79.553 23.622,81.636 22.352,82.906 22,82.906 22,83.058 ; 39,64.135 37.389,64.135 37.389,67.056 38.405,68.072 40.03,68.072 40.665,68.707 40.665,71.984 39.624,73.025 39.37,73.025 39,73.395 39,73.406
  Bottom Layer w0.3: v1(22.022,85.75) v1(28.473,85.75) ; v1(27.356,153.492) v1(33.731,153.492) ; v1(31.648,105.385) 35.162,105.385 v1(36.278,106.5) ; DA12.4@32.25,5.19 33.426,6.366 33.426,8.636 33.071,8.992 31.75,8.992 28.372,12.37 28.372,38.735 v1(45.441,55.804) ; v1(32.918,173.025) 41.3,173.025 v1(42.088,173.812) 42.901,172.999 v1(55.245,172.999) ; v1(33.096,146.279) 12.757,146.279 11.328,144.85 X2.2@10.32,144.85 X2.1@10.32,141.85 10.32,139.802 11.184,138.938 33.731,138.938 35.509,137.16 v1(35.509,125.73) ; v1(35.89,88.214) v1(35.89,95.606)
+5V: C17.1 C28.2 C29.2 C30.2 C37.2 C38.2 C39.2 DA1.6 DA4.5 DA5.5 DA6.5 DA9.5 DA10.5 DA11.5 DA15.6 DA19.6 DA21.6 DA25.6 R97.1 R99.1 R101.1 X3.4 X3.8 X3.9 X3.14 X3.18 X3.19 X4.5 X4.15 X5.1 X5.2 | length 567
  Top Layer w0.25: 19.82,112.5 21.59,112.5 ; 19.823,102.5 R97.1@22,102.5 ; 21.285,107.805 21.59,107.5 R99.1@22,107.5 ; 21.285,112.195 21.59,112.5 ; R101.1@22,112.5 21.59,112.5 ; 64.7,118.772 C29.2@64.7,129 64.7,133.4 ; 64.7,145.72 C39.2@64.7,141 64.7,140.481 65.43,139.751 ; 64.7,146.812 C30.2@64.7,154 64.7,158.168 ; 64.7,159.832 C37.2@64.7,166 64.7,168.783 ; 64.7,174.523 C28.2@64.7,177 64.7,181.356 ; 64.7,182.832 C38.2@64.7,187 64.7,192.049
  Top Layer w0.3: X3.4@10,113 8.585,111.585 8.585,102.616 ; X3.8@10,125 X3.9@10,128 ; DA1.6@11.19,23 12.45,24.26 C17.1@12.45,37.75 12.45,63.55 X5.1@10,66 X5.2@10,69 8.585,70.415 8.585,102.616 ; X3.19@13,128 X3.18@13,125 11.582,123.582 11.582,115.027 12.111,114.498 12.111,113.889 X3.14@13,113 15.824,113 17.155,111.669 18.989,111.669 19.82,112.5 ; 19.823,102.5 18.669,101.346 9.855,101.346 8.585,102.616 ; 21.285,107.805 21.285,112.195 ; DA25.6@59.38,64 60.546,64 60.808,64.262 60.808,81.28 60.548,81.54 60.452,81.54 ; DA21.6@59.38,81.54 60.452,81.54 ; DA19.6@60,115.54 61.417,115.54 ; 64.7,118.772 61.468,115.54 61.417,115.54 ; 64.7,133.4 65.3,134 65.786,134 ; 64.7,145.72 64.98,146 65.512,146 ; 64.7,146.812 65.512,146 ; 64.7,158.168 65.532,159 ; 64.7,159.832 65.532,159 ; 64.7,168.783 64.643,168.84 64.643,174.466 64.7,174.523 ; 64.7,181.356 65.344,182 65.532,182 ; 64.7,182.832 65.532,182 ; 64.7,192.049 65.651,193 DA10.5@66.3,193 ; 65.43,139.751 65.43,134.356 65.786,134 ; DA5.5@66.3,134 65.786,134 ; DA11.5@66.3,146 65.512,146 ; DA6.5@66.3,159 65.532,159 ; DA9.5@66.3,171 66.809,171 67.259,171.45 v1(67.259,174.346) ; v1(67.488,181.737) 67.225,182 DA4.5@66.3,182 65.532,182 ; 60.452,81.54 60.808,81.896 60.808,88.011 58.09,90.729 58.09,97.536 58.634,98.08 DA15.6@60,98.08 61.417,98.08 61.417,115.54
  Bottom Layer w0.3: X3.4@10,113 X3.14@13,113 14.766,113 15.249,113.483 19.684,113.483 20.493,112.674 46.436,112.674 49.301,115.54 DA19.6@60,115.54 ; X3.9@10,128 X3.19@13,128 ; DA1.6@11.19,23 8.077,19.887 8.077,3.175 9.144,2.108 60.272,2.108 60.855,2.691 63.863,2.691 64.447,2.108 166.779,2.108 185.52,20.85 X4.15@186.68,20.85 X4.5@189.68,20.85 ; v1(67.259,174.346) 67.488,174.574 v1(67.488,181.737)
+5VOp: C1.1 C2.1 C3.1 C4.1 C5.1 C6.1 C7.1 C8.1 C12.1 C13.1 C14.1 C15.1 C21.1 DA3.6 DD1.4 DD2.4 DD3.4 DD4.4 DD5.4 DD6.4 DD7.4 DD8.4 DD10.4 DD11.4 DD12.4 DD13.4 R1.2 R2.2 R3.2 R4.2 R12.2 R13.2 R14.2 R15.2 R27.2 R28.2 R29.2 R30.2 | length 654
  Top Layer w0.25: 93.621,192.707 96.65,192.707 98.019,191.338 C7.1@98.019,189 ; v1(97.536,145.415) 97.536,144 C13.1@98,144 ; C14.1@98,129 98.704,129 ; C12.1@98,159 99.568,159 ; C8.1@98,174 99.583,174 100.645,174 ; C7.1@98,189 C7.1@98.019,189 ; 99.568,129 98.704,129 ; 99.639,114 C15.1@98,114 98.704,114.254 98.704,129 ; 99.849,189 C7.1@98.019,189 ; 101.295,159 99.568,159 ; 101.752,156.816 99.568,159 ; C5.1@126,129 126.435,129 126.578,129.143 ; C4.1@126,144 C4.1@126.136,144 ; C3.1@126,159 126.463,159 126.721,159.258 ; C2.1@126,174.5 126.388,174.5 ; C1.1@126,189.5 C1.1@126.009,189.5 ; 126.009,192.278 C1.1@126.009,189.5 ; 126.136,154.991 C4.1@126.136,144 ; 126.721,129 126.578,129.143 ; 126.721,144 C4.1@126.136,144 ; 126.721,155.575 126.721,159.258 ; 126.726,129.291 126.578,129.143 ; C1.1@126.009,189.5 126.451,189.5 126.721,189.23 126.721,174.5 ; 126.388,174.5 126.721,174.168 ; 126.388,174.5 126.721,174.5 ; 126.721,159.258 126.721,174.168 ; 126.721,174.168 126.721,174.5
  Top Layer w0.3: R28.2@76,139.375 R28.2@76.507,139.375 ; R27.2@76,154.25 76.352,154.25 76.352,154.85 79.502,158 DD10.4@83.4,158 84.621,158 ; R15.2@76,169.125 77.888,169.125 81.763,173 DD8.4@83.4,173 84.811,173 84.811,184.734 ; R14.2@76,184.25 78.003,184.25 81.753,188 DD7.4@83.4,188 84.517,188 84.811,187.706 84.811,184.734 ; DD12.4@83.4,128 81.857,128 78.232,124.375 76.708,124.375 ; v1(96.8,21.28) C21.1@96.8,29 92.666,29 84.836,36.83 84.836,112.746 84.582,113 DD13.4@83.4,113 79.502,113 76.408,109.906 76.408,109.25 R30.2@76,109.25 74.981,109.25 74.981,112.344 77.013,114.376 77.013,124.07 76.708,124.375 ; 99.568,129 100.889,127.679 100.889,125.852 102.616,124.125 103.124,124.125 ; 99.583,174 100.863,172.72 100.863,170.688 102.279,169.273 ; 99.639,114 100.863,112.776 100.863,110.744 102.482,109.125 R13.2@104,109.125 105.004,109.125 106.458,107.671 111.76,107.671 112.801,108.712 112.801,112.467 112.268,113 DD6.4@111.4,113 109.615,113 ; 99.849,189 102.616,186.233 102.616,184.633 103.124,184.125 R1.2@104,184.125 ; 100.645,174 102.279,175.634 ; 101.295,159 102.279,159.984 102.279,169.273 ; v1(101.752,149.631) 101.752,156.816 102.186,156.382 102.186,154.94 103.036,154.09 ; R12.2@104,124.125 103.124,124.125 ; R4.2@104,139.125 104.837,139.125 108.712,143 DD4.4@111.4,143 112.522,143 ; R2.2@104,169.125 102.426,169.125 102.279,169.273 ; DD5.4@111.4,128 112.531,128 112.801,128.27 112.801,142.721 ; DD3.4@111.4,158 112.535,158 112.801,157.734 112.801,148.539 ; DD2.4@111.4,173 113.564,173 117.707,177.143 ; DD1.4@111.4,188 110.236,188 109.728,187.492 ; 126.009,192.278 125.501,192.786 120.904,192.786 120.396,192.278 120.396,179.832 117.707,177.143 ; 126.136,154.991 126.721,155.575 ; 126.365,114 126.721,114.356 126.721,129 ; 126.721,144 126.726,143.995 126.726,129.291 ; R28.2@76.507,139.375 76.507,140.005 79.502,143 DD11.4@83.4,143 84.504,143 85.977,144.474 85.977,156.643 84.621,158 ; R28.2@76.507,139.375 77.516,139.375 78.715,138.176 78.715,131.911 77.994,131.191 75.362,131.191 74.981,130.81 74.981,124.714 75.32,124.375 R29.2@76,124.375 76.708,124.375 ; 84.621,158 85.115,158 87.503,160.388 87.503,186.588 93.621,192.707 92.783,192.707 84.811,184.734 ; 102.279,169.273 102.279,175.634 ; 102.279,175.634 102.413,175.768 102.413,180.518 104,182.105 104,182.892 ; 102.279,175.634 102.279,181.171 104,182.892 ; 103.036,154.09 R3.2@104,154.125 ; 103.036,154.09 102.362,153.416 102.362,124.887 103.124,124.125 ; 103.036,154.09 103.071,154.125 R3.2@104,154.125 ; R3.2@104,154.125 107.216,154.125 112.801,148.539 ; 104,182.892 R1.2@104,184.125 ; R1.2@104,184.125 106.361,184.125 109.728,187.492 ; 109.728,187.492 109.728,183.109 110.744,182.093 116.63,182.093 117.707,181.015 117.707,177.143 ; 112.522,143 112.545,143 112.801,143.256 ; 112.522,143 112.801,142.721 ; 112.801,142.721 112.801,143.256 ; 112.801,143.256 112.801,148.539
  Top Layer w0.4: 109.615,113 DD6.4@111.4,113 ; C6.1@126,114 126.365,114
  Bottom Layer w0.3: v1(96.8,21.28) DA3.6@102.08,16 ; v1(97.536,145.415) v1(101.752,149.631)
+15V: C50.2 C52.2 C53.2 DA2.1 DA7.4 DA13.1 DA15.3 DA16.1 DA17.4 DA19.3 DA21.3 DA22.4 DA23.1 DA25.3 DA26.4 DA28.1 DA29.1 VD1.A VD2.A VD5.A VD6.A VD7.A VD8.A | length 556.9
  Top Layer w0.25: 93.091,45.288 102.1,45.288 ; 93.091,59.639 93.091,68.732 95.098,70.739 102.1,70.739 C50.2@102.1,70.9 102.1,72.39 ; v1(100.863,92.151) 101.115,91.9 C53.2@102.1,91.9 102.1,76.2 ; 102.1,40.353 102.1,45.288 ; C52.2@102.1,45.9 102.1,45.288
  Top Layer w0.3: DA25.3@67,64 65.845,64 65.583,64.262 65.583,81.28 65.843,81.54 DA21.3@67,81.54 ; DA15.3@67.62,98.08 69.037,98.08 69.037,115.54 DA19.3@67.62,115.54 ; DA7.4@86,13.08 95.909,13.08 98.374,15.545 98.374,36.627 102.1,40.353 ; 93.091,45.288 93.091,59.639 95.326,57.404 95.326,54.483 97.814,51.995 DA22.4@100.006,51.995 ; v1(97.815,95.504) 99.515,95.504 DA26.4@100.006,95.995 ; 102.1,72.39 100,74.49 100,74.995 DA17.4@100.006,74.995 100.895,74.995 102.1,76.2 ; v1(127.533,102.337) 127.533,156.058 133.807,162.331 139.192,162.331 139.7,161.823 VD6.A@139.7,161 139.7,155.429 141.224,153.905 DA23.1@142.206,153.905 142.206,157.395 ; VD2.A@160.7,189 VD2.A@160.7,189.154 ; DA28.1@163.206,153.905 v1(166.522,153.905) ; DA13.1@163.206,181.905 163.195,181.905 163.195,183.896 163.83,184.531 164.795,184.531 165.887,183.439 165.887,169.24 172.339,162.789 ; v1(166.522,159.41) 165.1,160.833 VD7.A@160.7,160.833 ; VD5.A@182.7,189 182.7,189.893 182.372,190.221 168.021,190.221 166.954,189.154 VD2.A@160.7,189.154 ; DA29.1@186.206,153.905 187.249,153.905 v1(188.595,155.251) ; DA16.1@186.206,181.905 186.979,181.905 188.254,180.63 188.254,160.746 187.122,159.614 ; v1(188.595,159.614) 187.122,159.614 ; 142.206,157.395 147.066,162.255 153.086,162.255 155.778,159.563 159.862,159.563 160.7,160.401 VD7.A@160.7,160.833 ; 142.206,157.395 142.206,158.36 145.481,161.635 145.481,177.431 144.254,178.658 144.254,180.764 143.113,181.905 DA2.1@142.206,181.905 141.224,181.905 139.7,183.429 VD1.A@139.7,189 139.7,189.662 141.453,191.414 159.512,191.414 160.7,190.226 VD2.A@160.7,189.154 ; VD7.A@160.7,160.833 VD7.A@160.7,161 160.7,162.052 161.437,162.789 172.339,162.789 ; 172.339,162.789 181.963,162.789 182.7,162.052 VD8.A@182.7,161 182.7,160.302 ; 182.7,160.302 183.388,159.614 187.122,159.614 ; 182.7,160.302 182.7,159.895 183.388,159.207 186.715,159.207 187.122,159.614
  Bottom Layer w0.3: DA21.3@67,81.54 68.072,81.54 69.037,82.505 ; DA15.3@67.62,98.08 69.037,96.663 69.037,82.505 ; v1(97.815,95.504) 97.815,93.997 95.969,92.151 ; v1(127.533,102.337) 117.348,92.151 v1(100.863,92.151) 95.969,92.151 ; v1(166.522,153.905) v1(166.522,159.41) ; v1(188.595,155.251) v1(188.595,159.614) ; 69.037,82.505 76.702,90.17 93.988,90.17 95.969,92.151
+24V: C16.1 C20.1 C31.1 C33.1 DA1.2 DA3.2 L1.1 L2.1 VD3.A VD4.A X6.1 | length 324.1
  Top Layer w0.3: C16.1@8.45,8 8.941,8 8.941,9.144 9.425,9.144 C16.1@9.425,8.175
  Top Layer w1.5: C16.1@8.45,8 9.325,8 9.5,7.825 v2(9.5,4.315) ; C16.1@9.425,8.175 9.425,10.871 10.304,11.75 17.5,11.75 21.35,15.6 ; DA1.2@21.35,23 21.35,15.6 ; C33.1@42,25.45 42,18 39.6,15.6 21.35,15.6 ; v2(58.5,5) 66.615,5 66.865,5.25 v2(67,5.25) 67,13.2 76,22.2 C31.1@76,31 ; C20.1@103.55,6 111,6 v2(112.1,7.1) 112.1,15.86 DA3.2@112.24,16
  Bottom Layer w1.5: v2@9.596,4.219 v2(9.5,4.315) 22.378,4.315 23.257,3.436 36,3.436 ; L2.1@33,31 33,16.067 36,13.067 36,3.436 ; v2(58.5,5) 56.936,3.436 36,3.436 ; v2(67,5.25) 67.096,5.154 69.783,5.154 71.231,3.706 90.4,3.706 ; L1.1@85,34 85,25 90.4,19.6 90.4,3.706 ; v2(112.1,7.1) 112.1,5.46 ; VD4.A@124,21.46 120.46,21.46 119.5,20.5 ; VD4.A@124,26.54 120.79,26.54 119.5,25.25 119.5,20.5 ; VD3.A@124.5,5.46 119.5,5.46 ; VD3.A@124.5,10.54 120.79,10.54 119.5,9.25 ; 90.4,3.706 103.432,3.706 105.186,5.46 112.1,5.46 ; 112.1,5.46 119.5,5.46 ; 119.5,5.46 119.5,9.25 ; 119.5,9.25 119.5,20.5
+24V_1: L5.1 R65.2 VD3.C | length 187.3
  Top Layer w0.25: R65.2@93.8,45.9 96.444,45.9
  Top Layer w0.3: 96.444,45.9 v1(96.873,46.33)
  Bottom Layer w0.3: v1(96.873,46.33) 124.079,46.33 129.642,40.767 129.642,35.636 129.134,35.128 129.134,8.636 129.77,8 VD3.C@134,8
  Bottom Layer w1.5: VD3.C@134,8 146.517,8 147.396,8.879 147.396,64.909 153.204,70.717 153.204,85.909 150.3,88.813 L5.1@150.3,103
+24V_2: L8.1 R74.2 VD4.C | length 114.2
  Top Layer w0.25: 109.887,50.4 R74.2@110.8,50.4
  Top Layer w0.3: v1(109.271,48.006) 109.271,49.784 109.887,50.4
  Bottom Layer w0.3: v1(109.271,48.006) 124.739,48.006 133.096,39.649 133.096,37.262 133.5,36.858 VD4.C@133.5,24
  Bottom Layer w1.5: VD4.C@133.5,24 136.35,26.85 136.35,38.516 136.504,38.67 136.504,40.33 136.35,40.484 136.35,73.6 142.25,79.5 149.8,79.5 L8.1@150.3,80
A1: DA8.6 DD9.14 | length 135.9
  Top Layer w0.15: DD9.14@32.35,179.25 35.535,179.25
  Top Layer w0.3: DA8.6@21.05,74.3 21.05,73.717 21.336,73.431 23.368,73.431 25.73,75.794 38.141,75.794 43.866,81.518 43.866,124.079 44.78,124.993 44.78,170.078 45.212,170.51 45.212,174.513 44.368,175.356 44.368,176.51 v1(43.536,177.343) ; 35.535,179.25 v1(36.655,178.13)
  Bottom Layer w0.3: v1(36.655,178.13) 37.189,177.596 43.283,177.596 v1(43.536,177.343)
A2: DA14.6 DD9.15 | length 108.4
  Top Layer w0.15: 31.047,178.75 DD9.15@32.35,178.75
  Top Layer w0.3: DA14.6@21.05,83.6 21.05,86.092 23.849,88.89 23.849,93.98 24.357,94.488 25.312,94.488 33.155,102.331 33.155,119.525 31.75,120.929 30.48,120.929 29.408,122.002 29.408,124.505 30.48,125.578 31.14,125.578 32.184,126.621 32.184,167.418 28.519,171.083 28.519,176.221 31.047,178.75
B1: DA8.4 DD9.29 | length 125.1
  Top Layer w0.15: DD9.29@40.25,176.35 40.25,177.292 41.3,178.029 43.643,175.686
  Top Layer w0.3: DA8.4@22.95,74.3 22.95,76.341 25.07,78.461 25.07,92.481 25.629,93.04 40.716,93.04 42.164,94.488 42.164,168.91 44.602,171.348 44.602,173.767 43.643,174.727 43.643,175.686
B2: DA14.4 DD9.30 | length 109.5
  Top Layer w0.15: 40.587,174.04 40.587,175.486 40.75,175.649 DD9.30@40.75,176.35
  Top Layer w0.3: DA14.4@22.95,83.6 22.95,86.907 24.46,88.417 24.46,93.574 24.765,93.878 38.462,93.878 41.402,96.818 41.402,168.224 39.776,169.85 39.776,173.23 40.587,174.04
D1_1: C19.2 DA2.4 R38.1 VT1.S VT4.D X4.3 | length 305
  Top Layer w0.3: DA2.4@142.206,178.095 141.275,178.095 137.094,173.914 137.094,173.599 v1(142.24,168.453)
  Top Layer w1.5: C19.2@136,183.3 134.3,183.3 133.25,182.25 133.25,181.25 133.25,179.25 133.25,178.25 134.25,177.25 R38.1@136,177.25 141.75,177.25 142.25,177.75 v2(142.25,176) ; VT4.D@164,122 166,120 v2(168.854,120) ; v2(178,120) 178.135,120 178.435,119.7 VT1.S@180.3,119.7 ; X4.3@189.68,26.85 X4.3@189.776,26.754
  Bottom Layer w0.3: v1(142.24,168.453) 142.24,162.154 163.407,140.987 163.407,119.185 164.592,118 166.854,118 v2(168.854,120)
  Bottom Layer w1.5: v2(142.25,176) 142.25,162.127 156.766,147.611 157.139,147.611 169.625,135.125 169.625,133.883 168.746,133.004 164.967,133.004 164.528,132.565 162.85,130.887 162.85,119.113 163.963,118 167.437,118 169.437,120 v2(178,120) 182.137,120 197.25,104.887 197.25,30.409 193.691,26.85 X4.3@189.68,26.85